# EAGLE board Mainboard_RIGHT (EAGLE 9.6.2), part 1 of 3
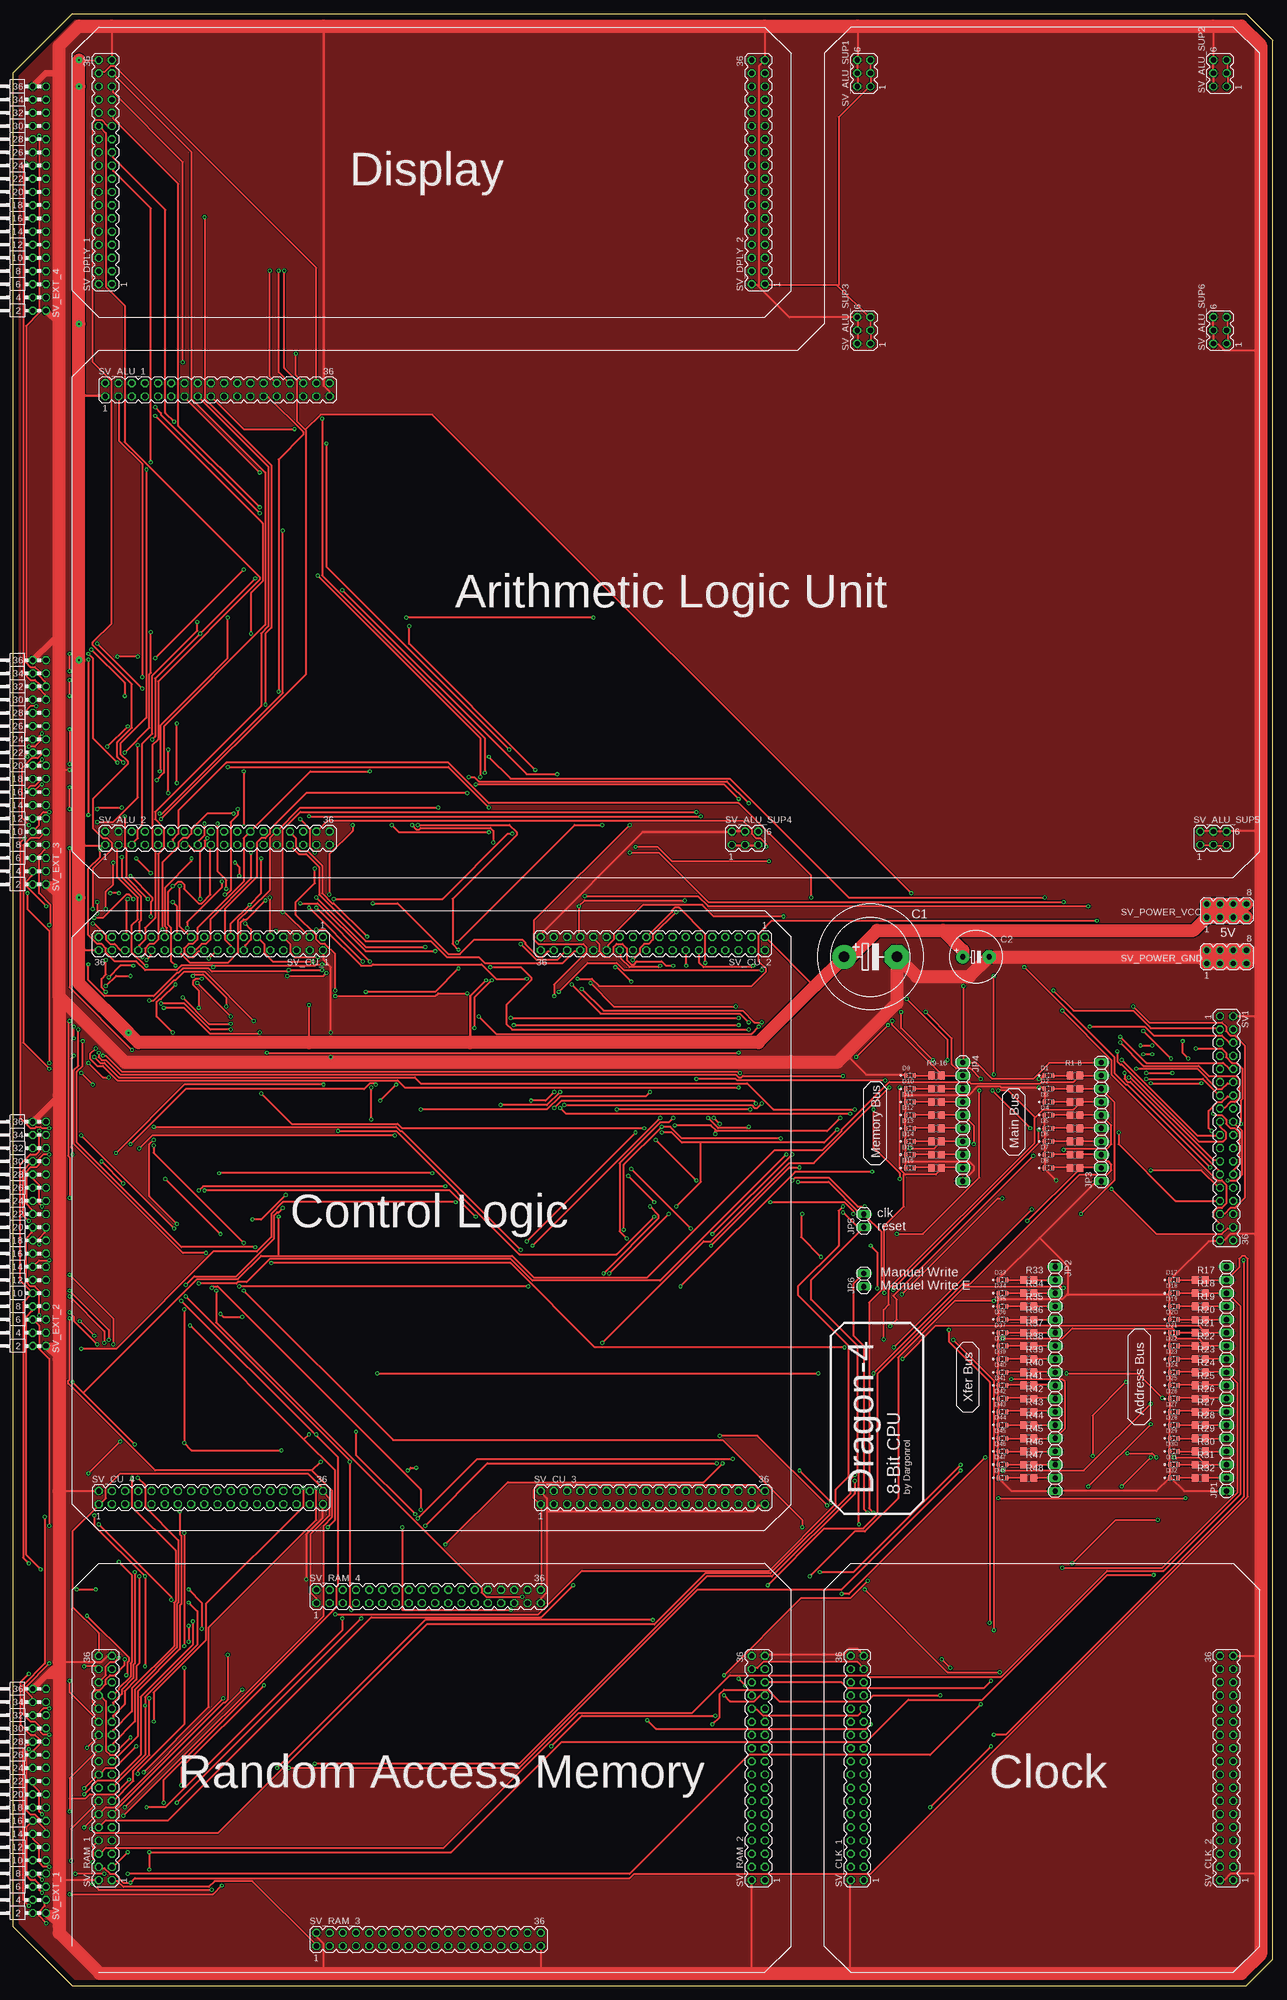
[diagram p0: board, top side]
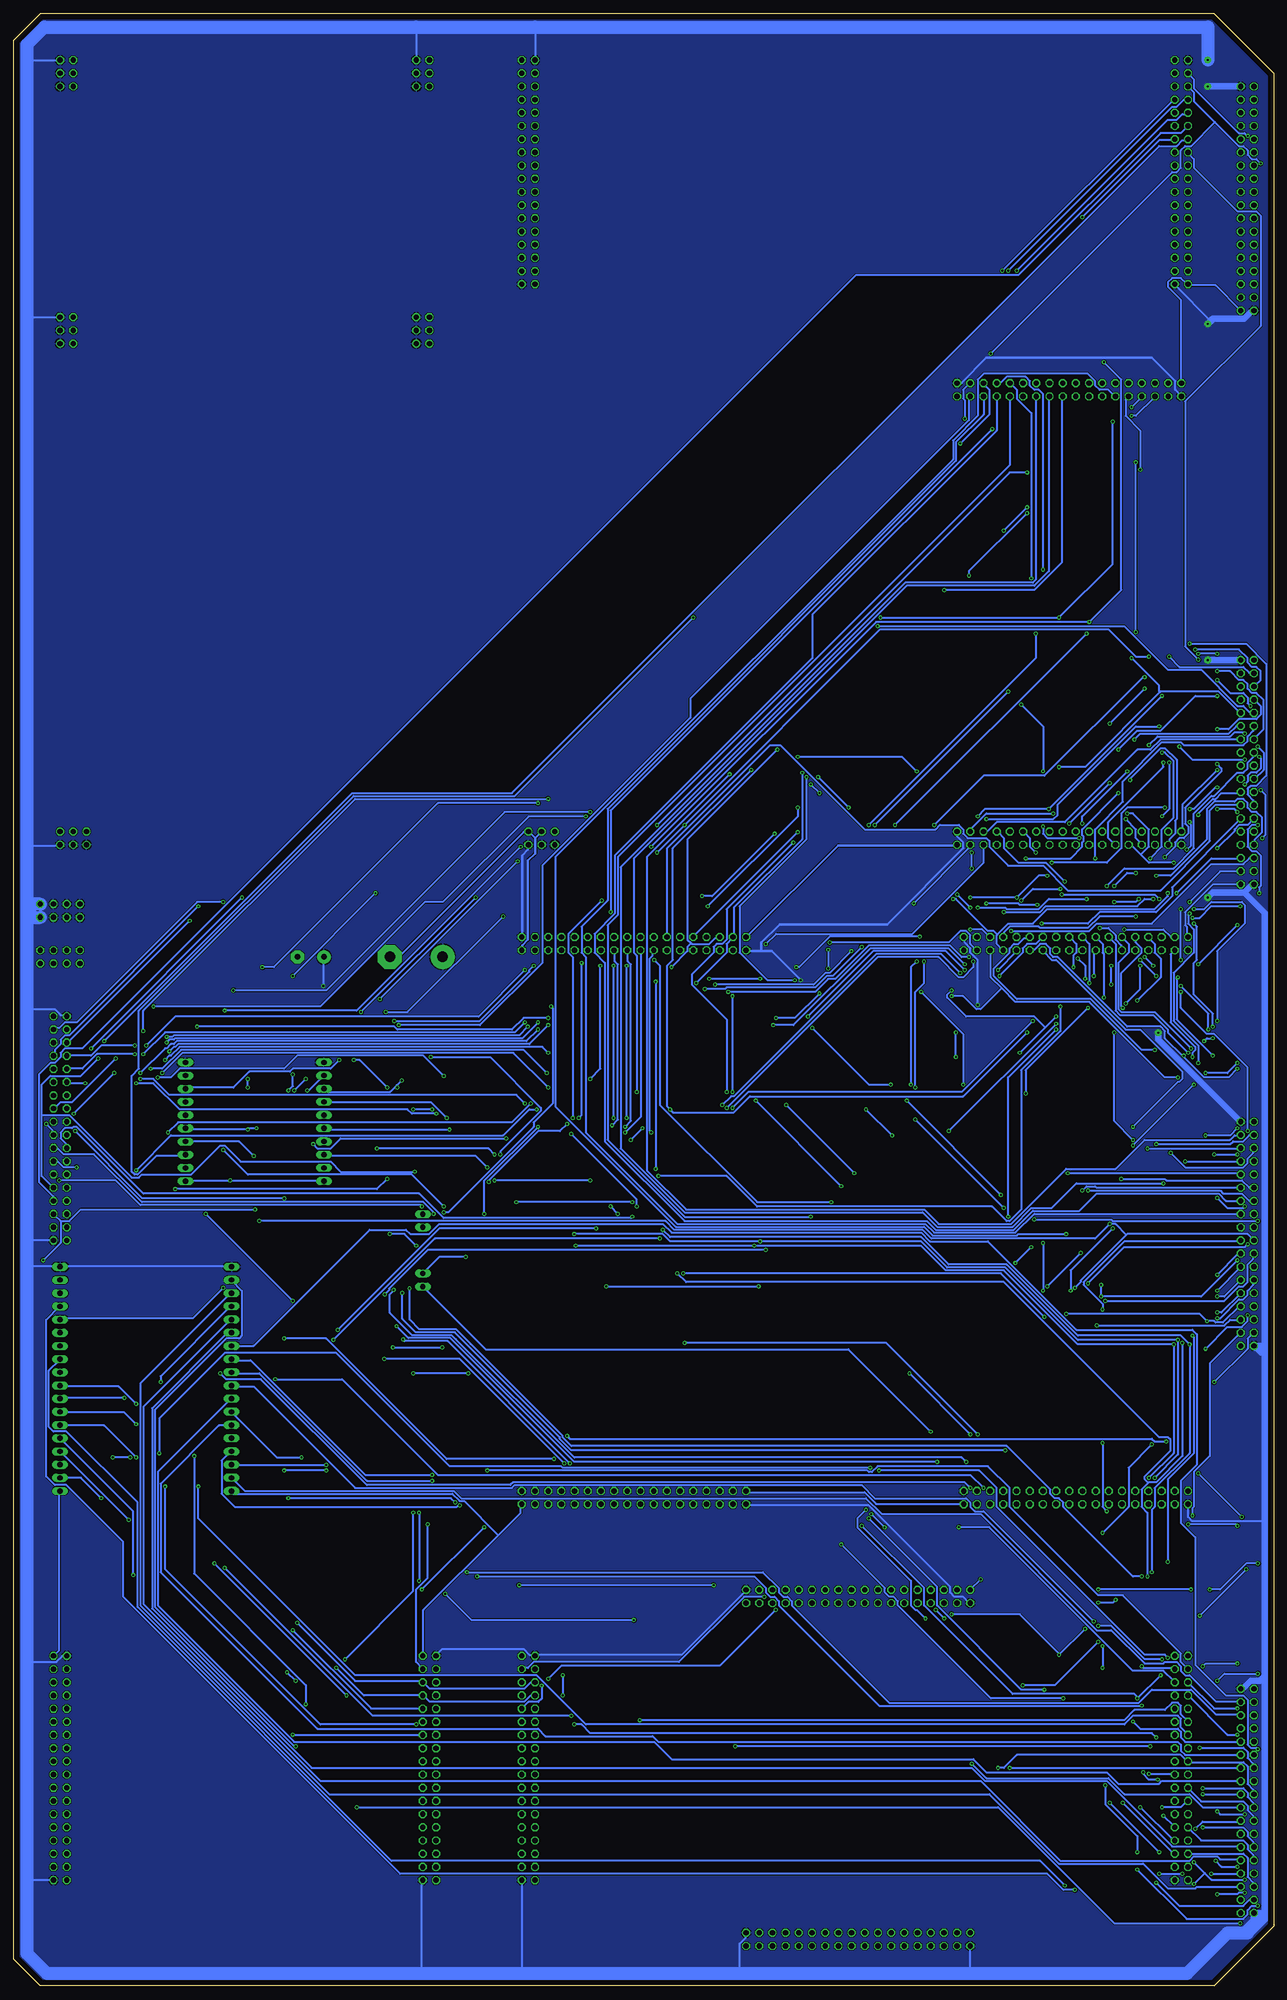
[diagram p1: board, bottom side, seen from below]

Size 242.57 x 379.73 mm. Coordinates in mm from the lower left corner, seen from the top.
Outline: 11.43,379.73 0,368.3 0,11.43 11.43,0 237.49,0 242.57,5.08 242.57,374.65 237.49,379.73 11.43,379.73
Copper layers (1*16): Top 0.035mm / dielectric 1.5mm / Bottom 0.035mm
Design rules "default *": minimum track width 16mil, minimum drill 0.35mm, track to track 6mil, track to pad 6mil, pad to pad 6mil, via to via 6mil, smd to smd 6mil, copper to edge 40mil, drill to drill 6mil, minimum pad ring 10mil, minimum via ring 8mil, stop-mask expansion 4mil, vias tented up to drill 0mil, thermal gap 10mil

## Footprints (pad centres in the part's own frame; a part is rotated, then mirrored left to right if it is on the bottom)
EB20D = drill 2.007 pad 4.597: + -5.08,0 | drill 2.007 pad 4.597 octagon: - 5.08,0
E5-10,5 = drill 1.016 pad 2.54: + -2.54,0 | drill 1.016 pad 2.54 octagon: - 2.54,0
LEDC1608X45N = smd 0.81 x 0.93: A 0.81,0; C -0.81,0
1X18 = drill 1.016 long: 1 -21.59,0; 2 -19.05,0; 3 -16.51,0; 4 -13.97,0; 5 -11.43,0; 6 -8.89,0; 7 -6.35,0; 8 -3.81,0; 9 -1.27,0; 10 1.27,0; 11 3.81,0; 12 6.35,0; 13 8.89,0; 14 11.43,0; 15 13.97,0; 16 16.51,0; 17 19.05,0; 18 21.59,0
1X10 = drill 1.016 long: 1 -11.43,0; 2 -8.89,0; 3 -6.35,0; 4 -3.81,0; 5 -1.27,0; 6 1.27,0; 7 3.81,0; 8 6.35,0; 9 8.89,0; 10 11.43,0
1X02 = drill 1.016 long: 1 -1.27,0; 2 1.27,0
R0805 = smd 1.3 x 1.5: 1 -0.95,0; 2 0.95,0
MA18-2 = drill 1.016 octagon: 1 -21.59,-1.27; 2 -21.59,1.27; 3 -19.05,-1.27; 4 -19.05,1.27; 5 -16.51,-1.27; 6 -16.51,1.27; 7 -13.97,-1.27; 8 -13.97,1.27; 9 -11.43,-1.27; 10 -11.43,1.27; 11 -8.89,-1.27; 12 -8.89,1.27; 13 -6.35,-1.27; 14 -6.35,1.27; 15 -3.81,-1.27; 16 -3.81,1.27; 17 -1.27,-1.27; 18 -1.27,1.27; 19 1.27,-1.27; 20 1.27,1.27; 21 3.81,-1.27; 22 3.81,1.27; 23 6.35,-1.27; 24 6.35,1.27; 25 8.89,-1.27; 26 8.89,1.27; 27 11.43,-1.27; 28 11.43,1.27; 29 13.97,-1.27; 30 13.97,1.27; 31 16.51,-1.27; 32 16.51,1.27; 33 19.05,-1.27; 34 19.05,1.27; 35 21.59,-1.27; 36 21.59,1.27
MA03-2 = drill 1.016: 1 -2.54,-1.27 | drill 1.016 octagon: 2 -2.54,1.27; 3 0,-1.27; 4 0,1.27; 5 2.54,-1.27; 6 2.54,1.27
MA18-2W = drill 1.016 octagon: 1 -21.59,-1.27; 2 -21.59,1.27; 3 -19.05,-1.27; 4 -19.05,1.27; 5 -16.51,-1.27; 6 -16.51,1.27; 7 -13.97,-1.27; 8 -13.97,1.27; 9 -11.43,-1.27; 10 -11.43,1.27; 11 -8.89,-1.27; 12 -8.89,1.27; 13 -6.35,-1.27; 14 -6.35,1.27; 15 -3.81,-1.27; 16 -3.81,1.27; 17 -1.27,-1.27; 18 -1.27,1.27; 19 1.27,-1.27; 20 1.27,1.27; 21 3.81,-1.27; 22 3.81,1.27; 23 6.35,-1.27; 24 6.35,1.27; 25 8.89,-1.27; 26 8.89,1.27; 27 11.43,-1.27; 28 11.43,1.27; 29 13.97,-1.27; 30 13.97,1.27; 31 16.51,-1.27; 32 16.51,1.27; 33 19.05,-1.27; 34 19.05,1.27; 35 21.59,-1.27; 36 21.59,1.27
MA04-2 = drill 1.016 octagon: 1 -3.81,-1.27; 2 -3.81,1.27; 3 -1.27,-1.27; 4 -1.27,1.27; 5 1.27,-1.27; 6 1.27,1.27; 7 3.81,-1.27; 8 3.81,1.27

## Placement (x,y rotation side)
C1  [EB20D]  165.1,198.12 0 top
C2  [E5-10,5]  185.42,198.12 0 top
D1  LTST-C193KRKT-5A  [LEDC1608X45N]  199.39,175.26 0 top
D2  LTST-C193KRKT-5A  [LEDC1608X45N]  199.39,172.72 0 top
D3  LTST-C193KRKT-5A  [LEDC1608X45N]  199.39,170.18 0 top
D4  LTST-C193KRKT-5A  [LEDC1608X45N]  199.39,167.64 0 top
D5  LTST-C193KRKT-5A  [LEDC1608X45N]  199.39,165.1 0 top
D6  LTST-C193KRKT-5A  [LEDC1608X45N]  199.39,162.56 0 top
D7  LTST-C193KRKT-5A  [LEDC1608X45N]  199.39,160.02 0 top
D8  LTST-C193KRKT-5A  [LEDC1608X45N]  199.39,157.48 0 top
D9  LTST-C193KRKT-5A  [LEDC1608X45N]  172.72,175.26 0 top
D10  LTST-C193KRKT-5A  [LEDC1608X45N]  172.72,172.72 0 top
D11  LTST-C193KRKT-5A  [LEDC1608X45N]  172.72,170.18 0 top
D12  LTST-C193KRKT-5A  [LEDC1608X45N]  172.72,167.64 0 top
D13  LTST-C193KRKT-5A  [LEDC1608X45N]  172.72,165.1 0 top
D14  LTST-C193KRKT-5A  [LEDC1608X45N]  172.72,162.56 0 top
D15  LTST-C193KRKT-5A  [LEDC1608X45N]  172.72,160.02 0 top
D16  LTST-C193KRKT-5A  [LEDC1608X45N]  172.72,157.48 0 top
D17  LTST-C193KRKT-5A  [LEDC1608X45N]  223.52,135.89 0 top
D18  LTST-C193KRKT-5A  [LEDC1608X45N]  223.52,133.35 0 top
D19  LTST-C193KRKT-5A  [LEDC1608X45N]  223.52,130.81 0 top
D20  LTST-C193KRKT-5A  [LEDC1608X45N]  223.52,128.27 0 top
D21  LTST-C193KRKT-5A  [LEDC1608X45N]  223.52,125.73 0 top
D22  LTST-C193KRKT-5A  [LEDC1608X45N]  223.52,123.19 0 top
D23  LTST-C193KRKT-5A  [LEDC1608X45N]  223.52,120.65 0 top
D24  LTST-C193KRKT-5A  [LEDC1608X45N]  223.52,118.11 0 top
D25  LTST-C193KRKT-5A  [LEDC1608X45N]  223.52,115.57 0 top
D26  LTST-C193KRKT-5A  [LEDC1608X45N]  223.52,113.03 0 top
D27  LTST-C193KRKT-5A  [LEDC1608X45N]  223.52,110.49 0 top
D28  LTST-C193KRKT-5A  [LEDC1608X45N]  223.52,107.95 0 top
D29  LTST-C193KRKT-5A  [LEDC1608X45N]  223.52,105.41 0 top
D30  LTST-C193KRKT-5A  [LEDC1608X45N]  223.52,102.87 0 top
D31  LTST-C193KRKT-5A  [LEDC1608X45N]  223.52,100.33 0 top
D32  LTST-C193KRKT-5A  [LEDC1608X45N]  223.52,97.79 0 top
D33  LTST-C193KRKT-5A  [LEDC1608X45N]  190.5,135.89 0 top
D34  LTST-C193KRKT-5A  [LEDC1608X45N]  190.5,133.35 0 top
D35  LTST-C193KRKT-5A  [LEDC1608X45N]  190.5,130.81 0 top
D36  LTST-C193KRKT-5A  [LEDC1608X45N]  190.5,128.27 0 top
D37  LTST-C193KRKT-5A  [LEDC1608X45N]  190.5,125.73 0 top
D38  LTST-C193KRKT-5A  [LEDC1608X45N]  190.5,123.19 0 top
D39  LTST-C193KRKT-5A  [LEDC1608X45N]  190.5,120.65 0 top
D40  LTST-C193KRKT-5A  [LEDC1608X45N]  190.5,118.11 0 top
D41  LTST-C193KRKT-5A  [LEDC1608X45N]  190.5,115.57 0 top
D42  LTST-C193KRKT-5A  [LEDC1608X45N]  190.5,113.03 0 top
D43  LTST-C193KRKT-5A  [LEDC1608X45N]  190.5,110.49 0 top
D44  LTST-C193KRKT-5A  [LEDC1608X45N]  190.5,107.95 0 top
D45  LTST-C193KRKT-5A  [LEDC1608X45N]  190.5,105.41 0 top
D46  LTST-C193KRKT-5A  [LEDC1608X45N]  190.5,102.87 0 top
D47  LTST-C193KRKT-5A  [LEDC1608X45N]  190.5,100.33 0 top
D48  LTST-C193KRKT-5A  [LEDC1608X45N]  190.5,97.79 0 top
JP1  [1X18]  233.68,116.84 90 top
JP2  [1X18]  200.66,116.84 270 top
JP3  [1X10]  209.55,166.37 90 top
JP4  [1X10]  182.88,166.37 270 top
JP5  [1X02]  163.83,147.32 90 top
JP6  [1X02]  163.83,135.89 90 top
R1  [R0805]  204.47,175.26 0 top
R2  [R0805]  204.47,172.72 0 top
R3  [R0805]  204.47,170.18 0 top
R4  [R0805]  204.47,167.64 0 top
R5  [R0805]  204.47,165.1 0 top
R6  [R0805]  204.47,162.56 0 top
R7  [R0805]  204.47,160.02 0 top
R8  [R0805]  204.47,157.48 0 top
R9  [R0805]  177.8,175.26 0 top
R10  [R0805]  177.8,172.72 0 top
R11  [R0805]  177.8,170.18 0 top
R12  [R0805]  177.8,167.64 0 top
R13  [R0805]  177.8,165.1 0 top
R14  [R0805]  177.8,162.56 0 top
R15  [R0805]  177.8,160.02 0 top
R16  [R0805]  177.8,157.48 0 top
R17  [R0805]  228.6,135.89 0 top
R18  [R0805]  228.6,133.35 0 top
R19  [R0805]  228.6,130.81 0 top
R20  [R0805]  228.6,128.27 0 top
R21  [R0805]  228.6,125.73 0 top
R22  [R0805]  228.6,123.19 0 top
R23  [R0805]  228.6,120.65 0 top
R24  [R0805]  228.6,118.11 0 top
R25  [R0805]  228.6,115.57 0 top
R26  [R0805]  228.6,113.03 0 top
R27  [R0805]  228.6,110.49 0 top
R28  [R0805]  228.6,107.95 0 top
R29  [R0805]  228.6,105.41 0 top
R30  [R0805]  228.6,102.87 0 top
R31  [R0805]  228.6,100.33 0 top
R32  [R0805]  228.6,97.79 0 top
R33  [R0805]  195.58,135.89 0 top
R34  [R0805]  195.58,133.35 0 top
R35  [R0805]  195.58,130.81 0 top
R36  [R0805]  195.58,128.27 0 top
R37  [R0805]  195.58,125.73 0 top
R38  [R0805]  195.58,123.19 0 top
R39  [R0805]  195.58,120.65 0 top
R40  [R0805]  195.58,118.11 0 top
R41  [R0805]  195.58,115.57 0 top
R42  [R0805]  195.58,113.03 0 top
R43  [R0805]  195.58,110.49 0 top
R44  [R0805]  195.58,107.95 0 top
R45  [R0805]  195.58,105.41 0 top
R46  [R0805]  195.58,102.87 0 top
R47  [R0805]  195.58,100.33 0 top
R48  [R0805]  195.58,97.79 0 top
SV1  [MA18-2]  233.68,165.1 270 top
SV_ALU_1  [MA18-2]  39.37,307.34 0 top
SV_ALU_2  [MA18-2]  39.37,220.98 0 top
SV_ALU_SUP1  [MA03-2]  163.83,368.3 90 top
SV_ALU_SUP2  [MA03-2]  232.41,368.3 90 top
SV_ALU_SUP3  [MA03-2]  163.83,318.77 90 top
SV_ALU_SUP4  [MA03-2]  140.97,220.98 0 top
SV_ALU_SUP5  [MA03-2]  231.14,220.98 0 top
SV_ALU_SUP6  [MA03-2]  232.41,318.77 90 top
SV_CLK_1  [MA18-2]  162.56,41.91 90 top
SV_CLK_2  [MA18-2]  233.68,41.91 90 top
SV_CU_1  [MA18-2]  38.1,200.66 180 top
SV_CU_2  [MA18-2]  123.19,200.66 180 top
SV_CU_3  [MA18-2]  123.19,93.98 0 top
SV_CU_4  [MA18-2]  38.1,93.98 0 top
SV_DPLY_1  [MA18-2]  17.78,349.25 90 top
SV_DPLY_2  [MA18-2]  143.51,349.25 90 top
SV_EXT_1  [MA18-2W]  5.08,35.56 90 top
SV_EXT_2  [MA18-2W]  5.08,144.78 90 top
SV_EXT_3  [MA18-2W]  5.08,233.68 90 top
SV_EXT_4  [MA18-2W]  5.08,344.17 90 top
SV_POWER_GND  [MA04-2]  233.68,198.12 0 top
SV_POWER_VCC  [MA04-2]  233.68,207.01 0 top
SV_RAM_1  [MA18-2]  17.78,41.91 90 top
SV_RAM_2  [MA18-2]  143.51,41.91 90 top
SV_RAM_3  [MA18-2]  80.01,8.89 0 top
SV_RAM_4  [MA18-2]  80.01,74.93 0 top

## Library data of the parts
C1 C2 = rcl; SPICEPREFIX: C
D1-D48 = Dargon's_lib; MANUFACTURER: Lite-On; MAXIMUM_PACKAGE_HEIGHT: 0.45 mm; PARTREV: C; STANDARD: IPC 7351B
JP1-JP6 = pinhead
R1-R48 = rcl; SPICEPREFIX: R
SV1 SV_ALU_1 SV_ALU_2 SV_ALU_SUP1-SV_ALU_SUP6 SV_CLK_1 SV_CLK_2 SV_CU_1-SV_CU_4 SV_DPLY_1 SV_DPLY_2 SV_EXT_1-SV_EXT_4 SV_POWER_GND SV_POWER_VCC SV_RAM_1-SV_RAM_4 = con-lstb; OC_FARNELL: unknown; OC_NEWARK: unknown

## Nets
!CLK: SV_ALU_1.32 SV_CLK_1.31 SV_CU_2.31 SV_DPLY_1.32 SV_EXT_3.29 SV_RAM_2.32
!CTRL_ALU_ASSERT: SV_ALU_2.32 SV_EXT_3.23
!CTRL_DPLY_ENABLE: SV_DPLY_1.22 SV_EXT_3.15
!CTRL_IR_LOAD: SV_CU_2.23 SV_EXT_3.13
!CTRL_RAM_ASSERT_MAIN: SV_EXT_3.21 SV_RAM_2.31
!CTRL_RAM_LOAD_MAIN: SV_EXT_3.17 SV_RAM_2.33
!RESET: SV_ALU_1.28 SV_CLK_1.27 SV_CU_2.27 SV_DPLY_1.28 SV_EXT_3.25 SV_RAM_2.28
ADDRESS_BUS_0: JP1.2 R32.2 SV_EXT_1.34 SV_RAM_1.34
ADDRESS_BUS_1: JP1.3 R31.2 SV_EXT_1.32 SV_RAM_1.32
ADDRESS_BUS_2: JP1.4 R30.2 SV_EXT_1.30 SV_RAM_1.30
ADDRESS_BUS_3: JP1.5 R29.2 SV_EXT_1.28 SV_RAM_1.28
ADDRESS_BUS_4: JP1.6 R28.2 SV_EXT_1.26 SV_RAM_1.26
ADDRESS_BUS_5: JP1.7 R27.2 SV_EXT_1.24 SV_RAM_1.24
ADDRESS_BUS_6: JP1.8 R26.2 SV_EXT_1.22 SV_RAM_1.22
ADDRESS_BUS_7: JP1.9 R25.2 SV_EXT_1.20 SV_RAM_1.20
ADDRESS_BUS_8: JP1.10 R24.2 SV_EXT_1.18 SV_RAM_1.18
ADDRESS_BUS_9: JP1.11 R23.2 SV_EXT_1.16 SV_RAM_1.16
ADDRESS_BUS_10: JP1.12 R22.2 SV_EXT_1.14 SV_RAM_1.14
ADDRESS_BUS_11: JP1.13 R21.2 SV_EXT_1.12 SV_RAM_1.12
ADDRESS_BUS_12: JP1.14 R20.2 SV_EXT_1.10 SV_RAM_1.10
ADDRESS_BUS_13: JP1.15 R19.2 SV_EXT_1.8 SV_RAM_1.8
ADDRESS_BUS_14: JP1.16 R18.2 SV_EXT_1.6 SV_RAM_1.6
ADDRESS_BUS_15: JP1.17 R17.2 SV_EXT_1.4 SV_RAM_1.4
ALU_LEFT_BUS_0: SV_ALU_1.3 SV_EXT_2.34
ALU_LEFT_BUS_1: SV_ALU_1.5 SV_EXT_2.32
ALU_LEFT_BUS_2: SV_ALU_1.7 SV_EXT_2.30
ALU_LEFT_BUS_3: SV_ALU_1.9 SV_EXT_2.28
ALU_LEFT_BUS_4: SV_ALU_1.11 SV_EXT_2.26
ALU_LEFT_BUS_5: SV_ALU_1.13 SV_EXT_2.24
ALU_LEFT_BUS_6: SV_ALU_1.15 SV_EXT_2.22
ALU_LEFT_BUS_7: SV_ALU_1.17 SV_EXT_2.20
ALU_RIGHT_BUS_0: SV_ALU_1.19 SV_EXT_2.33
ALU_RIGHT_BUS_1: SV_ALU_1.21 SV_EXT_2.31
ALU_RIGHT_BUS_2: SV_ALU_1.23 SV_EXT_2.29
ALU_RIGHT_BUS_3: SV_ALU_1.25 SV_EXT_2.27
ALU_RIGHT_BUS_4: SV_ALU_1.27 SV_EXT_2.25
ALU_RIGHT_BUS_5: SV_ALU_1.29 SV_EXT_2.23
ALU_RIGHT_BUS_6: SV_ALU_1.31 SV_EXT_2.21
ALU_RIGHT_BUS_7: SV_ALU_1.33 SV_EXT_2.19
CLK: JP5.1 SV_ALU_1.34 SV_CLK_1.33 SV_CU_2.33 SV_DPLY_1.34 SV_EXT_3.31 SV_RAM_2.34
CTRL1_REG_A_1: SV1.3 SV_CU_1.3 SV_EXT_3.4
CTRL2_REG_A_2: SV1.5 SV_CU_1.5 SV_EXT_3.6
CTRL3_REG_A_3: SV1.7 SV_CU_1.7 SV_EXT_3.8
CTRL4_REG_A_4: SV1.9 SV_CU_1.9 SV_EXT_3.10
CTRL5_REG_L_1: SV1.11 SV_CU_1.11 SV_EXT_3.12
CTRL6_REG_L_2: SV1.13 SV_CU_1.13 SV_EXT_3.14
CTRL7_REG_L_3: SV1.15 SV_CU_1.15 SV_EXT_3.16
CTRL8_REG_L_4: SV1.17 SV_CU_1.17 SV_EXT_3.18
CTRL9_16REG_A_ADDR_1: SV1.19 SV_CU_1.19 SV_EXT_3.20
CTRL10_16REG_A_ADDR_2: SV1.21 SV_CU_1.21 SV_EXT_3.22
CTRL11_16REG_A_ADDR_3: SV1.23 SV_CU_1.23 SV_EXT_3.24
CTRL12_CREG_INC_1: SV1.25 SV_CU_1.25 SV_EXT_3.26
CTRL13_CREG_INC_2: SV1.27 SV_CU_1.27 SV_EXT_3.28
CTRL14_CREG_DEC_1: SV1.29 SV_CU_1.29 SV_EXT_3.30
CTRL15_CREG_DEC_2: SV1.31 SV_CU_1.31 SV_EXT_3.32
CTRL16_FLAGS: SV1.33 SV_ALU_2.34 SV_CU_1.33
CTRL17_GPR_A_ALU_R_1: SV1.4 SV_CU_1.4 SV_EXT_3.34
CTRL18_GPR_A_ALU_R_2: SV1.6 SV_CU_1.6 SV_EXT_3.3
CTRL19_GPR_A_ALU_R_3: SV1.8 SV_CU_1.8 SV_EXT_3.5
CTRL20_GPR_A_ALU_L_1: SV1.10 SV_CU_1.10 SV_EXT_3.7
CTRL21_GPR_A_ALU_L_2: SV1.12 SV_CU_1.12 SV_EXT_3.9
CTRL22_GPR_A_ALU_L_3: SV1.14 SV_CU_1.14 SV_EXT_3.11
CTRL23_NONE_1: SV1.16 SV_CU_1.16
CTRL24_NONE_2: SV1.18 SV_CU_1.18
CTRL25_ALU_OP_1: SV1.20 SV_ALU_2.24 SV_CU_1.20
CTRL26_ALU_OP_2: SV1.22 SV_ALU_2.26 SV_CU_1.22
CTRL27_ALU_OP_3: SV1.24 SV_ALU_2.28 SV_CU_1.24
CTRL28_ALU_OP_4: SV1.26 SV_ALU_2.30 SV_CU_1.26
CTRL29_DPLY_RS: SV1.28 SV_CU_1.28 SV_DPLY_1.24
CTRL30_DPLY_RW: SV1.30 SV_CU_1.30 SV_DPLY_1.26
CTRL31_HLT: SV1.32 SV_CLK_1.23 SV_CU_1.32
CTRL32_RST_STEP: SV1.34 SV_CU_1.34
CTRL_MANUAL_WRITE: JP6.2 SV_CU_2.19 SV_RAM_2.29
CTRL_MANUAL_WRITE_ENABLE: JP6.1 SV_RAM_2.27
FLAGS_1: SV_ALU_2.33 SV_CU_2.34
FLAGS_2: SV_ALU_2.31 SV_CU_2.32
FLAGS_3: SV_ALU_2.29 SV_CU_2.30
FLAGS_4: SV_CU_2.28
GND: C1.- C2.- D1.C D2.C D3.C D4.C D5.C D6.C D7.C D8.C D9.C D10.C D11.C D12.C D13.C D14.C D15.C D16.C D17.C D18.C D19.C D20.C D21.C D22.C D23.C D24.C D25.C D26.C D27.C D28.C D29.C D30.C D31.C D32.C D33.C D34.C D35.C D36.C D37.C D38.C D39.C D40.C D41.C D42.C D43.C D44.C D45.C D46.C D47.C D48.C JP1.1 JP2.18 JP3.1 JP4.10 SV1.2 SV1.35 SV_ALU_1.2 SV_ALU_1.35 SV_ALU_2.2 SV_ALU_2.35 SV_ALU_SUP1.2 SV_ALU_SUP1.4 SV_ALU_SUP1.6 SV_ALU_SUP2.2 SV_ALU_SUP2.4 SV_ALU_SUP2.6 SV_ALU_SUP3.2 SV_ALU_SUP3.4 SV_ALU_SUP3.6 SV_ALU_SUP4.2 SV_ALU_SUP4.4 SV_ALU_SUP4.6 SV_ALU_SUP5.2 SV_ALU_SUP5.4 SV_ALU_SUP5.6 SV_ALU_SUP6.2 SV_ALU_SUP6.4 SV_ALU_SUP6.6 SV_CLK_1.2 SV_CLK_1.35 SV_CLK_2.2 SV_CLK_2.35 SV_CU_1.2 SV_CU_1.35 SV_CU_2.2 SV_CU_2.35 SV_CU_3.2 SV_CU_3.35 SV_CU_4.2 SV_CU_4.35 SV_DPLY_1.2 SV_DPLY_1.35 SV_DPLY_2.2 SV_DPLY_2.35 SV_EXT_1.1 SV_EXT_1.36 SV_EXT_2.1 SV_EXT_2.36 SV_EXT_3.1 SV_EXT_3.36 SV_EXT_4.1 SV_EXT_4.36 SV_POWER_GND.1 SV_POWER_GND.2 SV_POWER_GND.3 SV_POWER_GND.4 SV_POWER_GND.5 SV_POWER_GND.6 SV_POWER_GND.7 SV_POWER_GND.8 SV_RAM_1.2 SV_RAM_1.35 SV_RAM_2.2 SV_RAM_2.35 SV_RAM_3.2 SV_RAM_3.35 SV_RAM_4.2 SV_RAM_4.35
MAIN_BUS_0: JP3.2 R8.2 SV_ALU_2.17 SV_DPLY_1.19 SV_EXT_2.18 SV_RAM_1.3
MAIN_BUS_1: JP3.3 R7.2 SV_ALU_2.15 SV_DPLY_1.21 SV_EXT_2.16 SV_RAM_1.5
MAIN_BUS_2: JP3.4 R6.2 SV_ALU_2.13 SV_DPLY_1.23 SV_EXT_2.14 SV_RAM_1.7
MAIN_BUS_3: JP3.5 R5.2 SV_ALU_2.11 SV_DPLY_1.25 SV_EXT_2.12 SV_RAM_1.9
MAIN_BUS_4: JP3.6 R4.2 SV_ALU_2.9 SV_DPLY_1.27 SV_EXT_2.10 SV_RAM_1.11
MAIN_BUS_5: JP3.7 R3.2 SV_ALU_2.7 SV_DPLY_1.29 SV_EXT_2.8 SV_RAM_1.13
MAIN_BUS_6: JP3.8 R2.2 SV_ALU_2.5 SV_DPLY_1.31 SV_EXT_2.6 SV_RAM_1.15
MAIN_BUS_7: JP3.9 R1.2 SV_ALU_2.3 SV_DPLY_1.33 SV_EXT_2.4 SV_RAM_1.17
MEMORY_BUS_0: JP4.9 R16.2 SV_CU_2.26 SV_EXT_2.17 SV_RAM_1.19
MEMORY_BUS_1: JP4.8 R15.2 SV_CU_2.24 SV_EXT_2.15 SV_RAM_1.21
MEMORY_BUS_2: JP4.7 R14.2 SV_CU_2.22 SV_EXT_2.13 SV_RAM_1.23
MEMORY_BUS_3: JP4.6 R13.2 SV_CU_2.20 SV_EXT_2.11 SV_RAM_1.25
MEMORY_BUS_4: JP4.5 R12.2 SV_CU_2.18 SV_EXT_2.9 SV_RAM_1.27
MEMORY_BUS_5: JP4.4 R11.2 SV_CU_2.16 SV_EXT_2.7 SV_RAM_1.29
MEMORY_BUS_6: JP4.3 R10.2 SV_CU_2.14 SV_EXT_2.5 SV_RAM_1.31
MEMORY_BUS_7: JP4.2 R9.2 SV_CU_2.12 SV_EXT_2.3 SV_RAM_1.33
N$2: D1.A R1.1
N$3: D2.A R2.1
N$4: D3.A R3.1
N$5: D4.A R4.1
N$6: D5.A R5.1
N$7: D6.A R6.1
N$8: D7.A R7.1
N$9: D8.A R8.1
N$10: D9.A R9.1
N$11: D10.A R10.1
N$12: D11.A R11.1
N$13: D12.A R12.1
N$14: D13.A R13.1
N$15: D14.A R14.1
N$16: D15.A R15.1
N$17: D16.A R16.1
N$18: D17.A R17.1
N$19: D18.A R18.1
N$20: D19.A R19.1
N$21: D20.A R20.1
N$22: D21.A R21.1
N$23: D22.A R22.1
N$24: D23.A R23.1
N$25: SV_EXT_3.19
N$26: D24.A R24.1
N$27: D25.A R25.1
N$28: D26.A R26.1
N$29: D27.A R27.1
N$30: D28.A R28.1
N$31: D29.A R29.1
N$32: D30.A R30.1
N$33: D31.A R31.1
N$34: D32.A R32.1
N$35: D33.A R33.1
N$36: D34.A R34.1
N$37: D35.A R35.1
N$38: D36.A R36.1
N$39: D37.A R37.1
N$40: D38.A R38.1
N$41: D39.A R39.1
N$42: D40.A R40.1
N$43: D41.A R41.1
N$44: D42.A R42.1
N$45: D43.A R43.1
N$46: D44.A R44.1
N$47: D45.A R45.1
N$48: D46.A R46.1
N$49: D47.A R47.1
N$50: D48.A R48.1
RESET: JP5.2 SV_ALU_1.30 SV_CLK_1.29 SV_CU_2.29 SV_DPLY_1.30 SV_EXT_3.27 SV_RAM_2.30
VCC: C1.+ C2.+ JP1.18 JP2.1 JP3.10 JP4.1 SV1.1 SV1.36 SV_ALU_1.1 SV_ALU_1.36 SV_ALU_2.1 SV_ALU_2.36 SV_ALU_SUP1.1 SV_ALU_SUP1.3 SV_ALU_SUP1.5 SV_ALU_SUP2.1 SV_ALU_SUP2.3 SV_ALU_SUP2.5 SV_ALU_SUP3.1 SV_ALU_SUP3.3 SV_ALU_SUP3.5 SV_ALU_SUP4.1 SV_ALU_SUP4.3 SV_ALU_SUP4.5 SV_ALU_SUP5.1 SV_ALU_SUP5.3 SV_ALU_SUP5.5 SV_ALU_SUP6.1 SV_ALU_SUP6.3 SV_ALU_SUP6.5 SV_CLK_1.1 SV_CLK_1.36 SV_CLK_2.1 SV_CLK_2.36 SV_CU_1.1 SV_CU_1.36 SV_CU_2.1 SV_CU_2.36 SV_CU_3.1 SV_CU_3.36 SV_CU_4.1 SV_CU_4.36 SV_DPLY_1.1 SV_DPLY_1.36 SV_DPLY_2.1 SV_DPLY_2.36 SV_EXT_1.2 SV_EXT_1.35 SV_EXT_2.2 SV_EXT_2.35 SV_EXT_3.2 SV_EXT_3.35 SV_EXT_4.2 SV_EXT_4.35 SV_POWER_VCC.1 SV_POWER_VCC.2 SV_POWER_VCC.3 SV_POWER_VCC.4 SV_POWER_VCC.5 SV_POWER_VCC.6 SV_POWER_VCC.7 SV_POWER_VCC.8 SV_RAM_1.1 SV_RAM_1.36 SV_RAM_2.1 SV_RAM_2.36 SV_RAM_3.1 SV_RAM_3.36 SV_RAM_4.1 SV_RAM_4.36
XFER_BUS_0: JP2.17 R48.2 SV_EXT_1.33
XFER_BUS_1: JP2.16 R47.2 SV_EXT_1.31
XFER_BUS_2: JP2.15 R46.2 SV_EXT_1.29
XFER_BUS_3: JP2.14 R45.2 SV_EXT_1.27
XFER_BUS_4: JP2.13 R44.2 SV_EXT_1.25
XFER_BUS_5: JP2.12 R43.2 SV_EXT_1.23
XFER_BUS_6: JP2.11 R42.2 SV_EXT_1.21
XFER_BUS_7: JP2.10 R41.2 SV_EXT_1.19
XFER_BUS_8: JP2.9 R40.2 SV_EXT_1.17
XFER_BUS_9: JP2.8 R39.2 SV_EXT_1.15
XFER_BUS_10: JP2.7 R38.2 SV_EXT_1.13
XFER_BUS_11: JP2.6 R37.2 SV_EXT_1.11
XFER_BUS_12: JP2.5 R36.2 SV_EXT_1.9
XFER_BUS_13: JP2.4 R35.2 SV_EXT_1.7
XFER_BUS_14: JP2.3 R34.2 SV_EXT_1.5
XFER_BUS_15: JP2.2 R33.2 SV_EXT_1.3

## Tracks (layer width: path | path; a pad name or v marks a point on that pad's centre or on a via)
!CLK  (via drill 0.35)
  Top 0.406: v2.52,350.93 1.96,350.37 1.96,252.86 3.35,251.46 4.19,251.46 5.03,250.62 5.03,249.78 6.15,248.67 6.15,247.83 SV_EXT_3.29 | v95.56,238.05 60.35,273.25 v60.35,297 | v188.04,69.85 188.04,116.23 180.21,124.05 v180.21,126.29 | v119.02,157.3 v130.48,145.85 | v119.02,193.34 116.23,196.14 v115.95,196.14 | v54.48,314.32 54.48,310.13 55.88,308.74 SV_ALU_1.32
  Bottom 0.406: v2.52,350.93 3.35,351.76 4.19,351.76 5.03,352.6 5.03,353.44 5.87,354.28 6.71,354.28 11.32,358.89 | 11.32,358.89 15.37,362.94 15.37,364.62 SV_DPLY_1.32 | SV_RAM_2.32 142.49,58.4 143.05,58.4 144.17,57.28 162.61,57.28 163.73,58.4 SV_CLK_1.31 164.01,58.67 176.86,58.67 v188.04,69.85 | 112.18,200.75 112.88,201.45 112.88,220.73 v95.56,238.05 | 112.18,200.75 112.04,200.61 108.69,200.61 107.57,201.73 106.73,201.73 SV_CU_2.31 | v60.35,297 54.76,302.59 54.76,307.34 55.88,308.46 SV_ALU_1.32 | v180.21,126.29 160.66,145.85 v130.48,145.85 | v119.02,193.34 v119.02,157.3 | v115.95,196.14 112.88,199.21 112.88,200.05 112.18,200.75 | 11.32,358.89 15.93,354.28 17.04,354.28 17.88,353.44 17.88,350.09 18.72,349.25 19.56,349.25 v54.48,314.32
!CTRL_ALU_ASSERT
  Bottom 0.406: SV_ALU_2.32 55.88,222.4 55.04,222.4 53.37,224.08 40.23,224.08 26.26,238.05 23.75,238.05 21.79,240 6.43,240 SV_EXT_3.23
!CTRL_DPLY_ENABLE  (via drill 0.35)
  Top 0.406: v14.53,255.37 v14.53,225.48
  Bottom 0.406: v14.53,225.48 14.53,225.75 11.73,228.55 11.18,228.55 10.06,229.67 6.43,229.67 SV_EXT_3.15 | v14.53,255.37 17.04,257.89 17.04,305.11 2.52,319.63 2.52,340.87 3.35,341.71 6.99,341.71 15.37,350.09 15.37,351.76 16.48,352.88 SV_DPLY_1.22
!CTRL_IR_LOAD
  Bottom 0.406: SV_EXT_3.13 6.43,227.43 11.18,227.43 12.29,226.31 12.29,220.45 21.79,210.95 39.67,210.95 44.42,215.7 51.13,215.7 54.76,219.33 54.76,220.45 55.32,221 58.95,221 59.79,221.84 59.79,222.68 60.63,223.52 64.26,223.52 65.1,222.68 78.79,222.68 95,238.89 96.95,238.89 116.79,219.05 116.79,202.01 SV_CU_2.23
!CTRL_RAM_ASSERT_MAIN  (via drill 0.35)
  Top 0.406: v188.32,58.67 186.92,57.28 160.66,57.28 159.54,58.4 145.01,58.4 SV_RAM_2.31 | v189.99,60.35 179.93,60.35 v164.01,76.28 | v151.99,88.29 151.99,89.69 136.63,105.05 73.2,105.05 v44.42,133.83 | v44.42,143.05 27.1,160.38 v27.1,161.77 | v13.13,175.74 v15.37,173.51 | v6.99,177.7 6.99,203.12 2.79,207.31 v2.79,210.39 | v3.07,223.52 1.68,224.92 1.68,234.42 3.63,236.37 4.75,236.37 5.87,237.49 SV_EXT_3.21
  Bottom 0.406: v189.99,60.35 v188.32,58.67 | v151.99,88.29 v164.01,76.28 | v44.42,143.05 v44.42,133.83 | v15.37,173.51 v27.1,161.77 | v13.13,175.74 8.94,175.74 v6.99,177.7 | v2.79,210.39 2.79,211.51 2.52,211.78 2.52,217.65 3.35,218.49 4.19,218.49 5.03,219.33 5.03,222.68 4.19,223.52 v3.07,223.52
!CTRL_RAM_LOAD_MAIN  (via drill 0.35)
  Top 0.406: v98.07,74.88 91.08,74.88 90.25,75.72 90.25,76.56 39.12,127.69 v39.12,133.83 | v13.13,163.73 v31.01,145.85 | v6.99,165.12 5.59,165.12 5.31,165.41 4.47,165.41 4.19,165.12 3.35,165.12 1.4,167.08 1.4,220.17 v2.23,221 | v2.52,230.23 3.35,231.06 4.19,231.06 5.31,232.18 6.15,232.18 SV_EXT_3.17
  Bottom 0.406: v98.07,74.88 101.98,74.88 114.55,62.31 142.49,62.31 143.61,61.19 144.73,61.19 SV_RAM_2.33 | v39.12,133.83 39.12,137.74 v31.01,145.85 | v13.13,163.73 8.38,163.73 v6.99,165.12 | v2.23,221 1.68,221.56 1.68,229.39 v2.52,230.23
!RESET  (via drill 0.35)
  Top 0.406: SV_RAM_2.28 142.49,53.09 143.33,53.09 144.45,51.97 162.61,51.97 163.73,53.09 SV_CLK_1.27 | v26.82,240 27.38,240.56 27.38,251.74 v36.04,260.4 v46.66,271.02 | v91.64,222.12 74.32,222.12 v72.92,223.52 | v49.45,330.25 49.45,309.86 50.57,308.74 SV_ALU_1.28 | v188.87,68.45 188.87,116.51 v181.05,124.33 | v118.19,143.89 116.79,145.29 116.79,158.42 124.61,166.24 126.29,166.24 v127.13,167.08 | v127.13,196.42 125.73,196.42 124.89,197.26 120.14,197.26 119.58,196.7 119.02,196.7 118.19,197.54 118.19,199.77 117.35,200.61 116.23,200.61 115.67,200.05 115.67,198.93 114.83,198.09 114,198.09 112.88,199.21 112.88,200.61 111.76,201.73 SV_CU_2.27
  Bottom 0.406: v26.82,240 25.7,241.12 8.66,241.12 7.26,242.52 6.43,242.52 SV_EXT_3.25 | v46.66,271.02 46.66,302.87 49.45,305.66 49.45,307.34 50.57,308.46 SV_ALU_1.28 | v91.64,222.12 111.76,202.01 SV_CU_2.27 | v36.04,260.4 v72.92,223.52 | v49.45,330.25 20.4,359.31 18.72,359.31 17.6,360.43 16.76,360.43 SV_DPLY_1.28 | v188.87,68.45 173.79,53.37 164.01,53.37 SV_CLK_1.27 | v181.05,124.33 161.49,143.89 v118.19,143.89 | v127.13,196.42 v127.13,167.08
ADDRESS_BUS_0  (via drill 0.35)
  Top 0.406: JP1.2 R32.2 | v6.99,62.03 2.52,57.56 2.52,56.72 3.63,55.6 3.63,54.76 SV_EXT_1.34 | v13.69,61.47 16.2,61.47 16.48,61.19 SV_RAM_1.34 | v189.71,93.88 v225.75,93.88 | v151.44,99.19 v157.58,93.04
  Bottom 0.406: v6.99,62.03 13.13,62.03 v13.69,61.47 | JP1.2 229.67,97.79 v225.75,93.88 | v189.71,93.88 158.42,93.88 v157.58,93.04 | v151.44,99.19 78.23,99.19 77.95,98.91 77.39,98.91 76.28,100.03 55.04,100.03 50.85,95.83 50.85,92.2 33.81,75.16 29.06,75.16 17.88,63.98 17.88,62.31 16.76,61.19 SV_RAM_1.34
ADDRESS_BUS_1  (via drill 0.35)
  Top 0.406: JP1.3 233.58,100.31 229.67,100.31 R31.2 229.39,100.58 228.27,101.7 v223.52,101.7 | v6.99,53.37 5.87,53.37 4.75,52.25 3.91,52.25 SV_EXT_1.32 | v220.17,101.7 219.33,102.54 v214.58,102.54 | v77.67,99.75 76.56,99.75 v76,99.19 | v20.4,63.14 19.56,62.31 18.72,62.31 17.88,61.47 17.88,59.79 SV_RAM_1.32
  Bottom 0.406: v6.99,53.37 11.46,53.37 SV_RAM_1.32 | v220.17,101.7 v223.52,101.7 | v214.58,102.54 214.58,109.25 202.01,121.82 180.49,121.82 158.7,100.03 137.19,100.03 136.91,99.75 v77.67,99.75 | v76,99.19 56.72,99.19 53.37,95.83 53.37,92.2 24.87,63.7 20.95,63.7 v20.4,63.14
ADDRESS_BUS_2  (via drill 0.35)
  Top 0.406: R30.2 229.67,102.82 233.58,102.82 JP1.4 | v6.99,48.34 5.87,48.34 4.75,49.45 3.91,49.45 SV_EXT_1.30 | v220.45,89.69 212.34,89.69 v203.96,81.31 | v178.54,55.88 165.68,55.88 164.57,54.76 147.52,54.76 145.29,57 136.91,57 136.07,56.16 136.07,51.69 v134.67,50.29 | v22.63,47.78 20.4,45.54 20.4,45.26 19.56,44.42 18.72,44.42 17.88,45.26 17.88,54.76 16.76,55.88 SV_RAM_1.30
  Bottom 0.406: v6.99,48.34 8.94,48.34 16.48,55.88 SV_RAM_1.30 | v220.45,89.69 233.58,102.82 JP1.4 | v178.54,55.88 v203.96,81.31 | v134.67,50.29 133.27,50.29 131.6,48.62 23.47,48.62 v22.63,47.78
ADDRESS_BUS_3  (via drill 0.35)
  Top 0.406: R29.2 229.67,105.33 233.58,105.33 JP1.5 | v3.07,15.37 1.96,16.48 1.96,45.54 2.79,46.38 3.07,46.38 3.63,46.94 SV_EXT_1.28 | v26.26,22.35 v26.26,25.7 84.38,25.7 105.61,46.94 164.29,46.94 172.39,55.04 186.64,55.04 210.67,79.07 v219.61,79.07 | v32.41,38.56 32.41,41.91 v48.34,57.84 | v33.81,69.29 v33.81,66.22 | v21.51,62.87 21.51,61.75 19.56,59.79 18.72,59.79 17.88,58.95 17.88,58.12 16.76,57 15.93,57 15.37,56.44 15.37,54.48 SV_RAM_1.28
  Bottom 0.406: v3.07,15.37 4.19,15.37 5.03,14.53 5.03,13.69 5.87,12.85 16.76,12.85 v26.26,22.35 | v26.26,25.7 26.26,28.78 32.41,34.92 v32.41,38.56 | v48.34,57.84 42.19,57.84 v33.81,66.22 | v33.81,69.29 31.29,69.29 24.87,62.87 v21.51,62.87 | v219.61,79.07 219.61,91.36 233.58,105.33 JP1.5
ADDRESS_BUS_4  (via drill 0.35)
  Top 0.406: R28.2 229.67,107.85 233.58,107.85 JP1.6 | v3.07,60.07 1.4,58.4 1.4,50.29 3.35,48.34 4.19,48.34 5.03,47.5 5.03,46.38 3.91,45.26 3.91,44.7 SV_EXT_1.26 | v10.9,58.67 10.9,56.44 16.48,50.85 SV_RAM_1.26 | v213.46,96.11 v219.05,101.7 | v165.12,50.29 164.29,49.45 123.77,49.45 v122.1,51.13
  Bottom 0.406: v3.07,60.07 9.5,60.07 v10.9,58.67 | v219.05,101.7 225.2,107.85 233.58,107.85 JP1.6 | v213.46,96.11 213.46,80.19 183.57,50.29 v165.12,50.29 | v122.1,51.13 28.78,51.13 26.82,53.09 20.95,53.09 19.56,54.48 18.44,54.48 17.88,53.92 17.88,52.25 16.48,50.85 SV_RAM_1.26
ADDRESS_BUS_5  (via drill 0.35)
  Top 0.406: R27.2 229.67,110.64 233.58,110.64 JP1.7 | v14.25,45.82 16.48,48.06 SV_RAM_1.24 | v207.03,96.11 v219.05,108.13
  Bottom 0.406: v14.25,45.82 5.87,45.82 5.03,44.98 5.03,43.87 3.91,42.75 3.91,41.91 SV_EXT_1.24 | v219.05,108.13 221.28,110.36 233.58,110.36 JP1.7 | v207.03,96.11 207.03,89.97 176.86,59.79 141.94,59.79 132.44,50.29 28.78,50.29 27.1,51.97 18.44,51.97 17.88,51.41 17.88,49.73 16.48,48.34 SV_RAM_1.24
ADDRESS_BUS_6  (via drill 0.35)
  Top 0.406: R26.2 229.67,113.16 233.58,113.16 JP1.8 | v5.59,32.97 5.03,33.53 5.03,37.44 3.91,38.56 3.91,39.12 SV_EXT_1.22 | 10.9,36.04 10.9,39.95 16.48,45.54 SV_RAM_1.22 | 10.9,36.04 v10.9,33.53 | v221.28,113.16 216.53,117.91 v202.84,117.91 | v58.4,95.83 58.4,89.69 37.72,69.01 37.72,53.65 v25.15,41.07 | v22.35,39.67 19.56,36.88 14.81,36.88 13.97,36.04 10.9,36.04
  Bottom 0.406: v5.59,32.97 10.34,32.97 v10.9,33.53 | v221.28,113.16 233.58,113.16 JP1.8 | v202.84,117.91 201.73,116.79 195.02,116.79 174.62,96.39 146.96,96.39 146.41,96.95 59.51,96.95 v58.4,95.83 | v25.15,41.07 25.15,40.79 24.03,39.67 v22.35,39.67
ADDRESS_BUS_7  (via drill 0.35)
  Top 0.406: R25.2 229.67,115.67 233.58,115.67 JP1.9 | v219.05,112.04 206.2,99.19 v190.55,99.19 | v182.45,99.19 159.54,76.28 131.88,76.28 97.51,41.91 v53.09,41.91
  Bottom 0.406: SV_EXT_1.20 3.91,36.88 3.91,37.72 5.03,38.84 5.03,42.19 5.87,43.03 16.48,43.03 SV_RAM_1.20 16.76,43.31 17.88,44.42 49.45,44.42 51.97,41.91 v53.09,41.91 | v219.05,112.04 222.4,115.39 233.58,115.39 JP1.9 | v182.45,99.19 v190.55,99.19
ADDRESS_BUS_8  (via drill 0.35)
  Top 0.406: R24.2 229.67,118.19 233.58,118.19 JP1.10 233.86,117.91 235.81,115.95 235.81,95 221.28,80.47 v202.01,80.47 | v13.69,38 16.48,40.79 SV_RAM_1.18 16.76,40.79 17.88,41.91 19.56,41.91 v23.75,46.1 | v135.23,51.97 109.53,51.97 v103.66,46.1
  Bottom 0.406: v13.69,38 5.87,38 5.03,37.16 5.03,36.32 3.91,35.2 3.91,34.37 SV_EXT_1.18 | v202.01,80.47 173.51,51.97 v135.23,51.97 | v23.75,46.1 v103.66,46.1
ADDRESS_BUS_9  (via drill 0.35)
  Top 0.406: R23.2 229.67,120.7 233.58,120.7 JP1.11 | v40.23,19.28 38.56,17.6 v10.9,17.6 | v5.59,17.88 5.03,18.44 5.03,19.56 4.19,20.4 3.35,20.4 2.52,21.23 2.52,30.45 SV_EXT_1.16
  Bottom 0.406: SV_EXT_1.16 3.91,31.85 3.91,32.69 5.03,33.81 5.03,34.65 5.87,35.48 13.97,35.48 16.48,38 SV_RAM_1.16 | v40.23,19.28 44.98,24.03 169.88,24.03 218.77,72.92 218.77,93.04 232.46,106.73 234.97,106.73 235.81,107.57 235.81,118.47 233.86,120.42 JP1.11 | v10.9,17.6 6.99,17.6 6.71,17.88 v5.59,17.88
ADDRESS_BUS_10  (via drill 0.35)
  Top 0.406: JP1.12 233.58,123.22 229.67,123.22 R22.2 229.39,123.22 228.83,123.77 228.83,124.05 228.27,124.61 224.08,124.61 223.52,125.17 223.52,126.29 223.24,126.57 203.96,126.57 202.01,124.61 v190.55,124.61 | v6.99,22.91 5.87,22.91 5.03,23.75 5.03,27.1 3.91,28.22 3.91,29.06 SV_EXT_1.14 | v11.18,24.03 11.18,30.18 16.48,35.48 SV_RAM_1.14 | v138.58,101.42 89.41,101.42 v77.95,89.97 | v21.51,34.37 v44.15,57
  Bottom 0.406: v6.99,22.91 10.06,22.91 v11.18,24.03 | v190.55,124.61 182.45,124.61 159.26,101.42 v138.58,101.42 | v77.95,89.97 64.82,76.83 64.82,73.2 48.62,57 v44.15,57 | v21.51,34.37 17.88,34.37 16.76,35.48 SV_RAM_1.14
ADDRESS_BUS_11  (via drill 0.35)
  Top 0.406: JP1.13 R21.2 229.39,125.73 228.83,126.29 228.83,126.57 228.27,127.13 177.7,127.13 v171.27,120.7 | v13.69,30.45 16.48,33.25 SV_RAM_1.12 16.76,33.25 17.88,34.37 19.56,34.37 v40.51,55.32 | v136.63,100.58 132.99,96.95 95.28,96.95 v83.26,84.94
  Bottom 0.406: v13.69,30.45 5.87,30.45 5.03,29.62 5.03,28.78 3.91,27.66 3.91,26.82 SV_EXT_1.12 | v171.27,120.7 156.74,120.7 v136.63,100.58 | v83.26,84.94 74.88,76.56 74.88,75.72 74.04,74.88 73.2,74.88 72.36,74.04 72.36,73.2 54.48,55.32 v40.51,55.32
ADDRESS_BUS_12  (via drill 0.35)
  Top 0.406: R20.2 229.67,128.25 233.58,128.25 JP1.14 | v202.29,134.39 202.01,134.39 201.73,134.67 183.29,134.67 166.52,117.91 166.52,90.81 163.73,88.01 156.19,88.01 v145.29,77.11 | v107.85,77.11 101.7,70.97 69.01,70.97 29.9,31.85 17.88,31.85 SV_RAM_1.10
  Bottom 0.406: SV_RAM_1.10 13.97,27.94 5.87,27.94 5.03,27.1 5.03,26.26 3.91,25.15 3.91,24.31 SV_EXT_1.10 | v202.29,134.39 208.15,128.52 233.58,128.52 JP1.14 | v107.85,77.11 v145.29,77.11
ADDRESS_BUS_13  (via drill 0.35)
  Top 0.406: R19.2 229.67,130.76 233.58,130.76 JP1.15 | v5.59,20.4 4.47,21.51 3.91,21.51 SV_EXT_1.8 | v15.37,23.75 15.37,26.82 16.48,27.94 SV_RAM_1.8 | v38.28,18.44 16.48,18.44 v15.37,19.56
  Bottom 0.406: v5.59,20.4 12.01,20.4 13.27,21.65 | v15.37,23.75 13.27,21.65 | v38.28,18.44 40.51,18.44 43.59,21.51 168.2,21.51 221.56,74.88 221.56,85.5 232.46,96.39 234.7,96.39 236.37,98.07 236.37,128.25 233.86,130.76 JP1.15 | 13.27,21.65 v15.37,19.56
ADDRESS_BUS_14
  Top 0.406: R18.2 229.67,133.27 233.58,133.27 JP1.16 233.86,133.27 236.37,130.76 236.37,94.72 221.56,79.91 210.67,79.91 190.27,59.51 164.57,59.51 164.29,59.79 138.02,59.79 130.76,52.53 108.97,52.53 82.98,26.54 17.88,26.54 16.76,25.43 SV_RAM_1.6
  Bottom 0.406: SV_EXT_1.6 3.91,19.28 3.91,19.84 5.03,20.95 5.03,24.59 5.87,25.43 16.48,25.43 SV_RAM_1.6
ADDRESS_BUS_15  (via drill 0.35)
  Top 0.406: R17.2 229.67,135.79 233.58,135.79 JP1.17 236.09,138.3 236.09,139.98 236.65,140.54 237.21,140.54 237.77,139.98 237.77,94.16 165.12,21.51 119.58,21.51 118.75,20.68 23.47,20.68 v22.63,19.84 21.23,19.84 19.56,21.51 18.72,21.51 17.6,22.63 16.76,22.63 SV_RAM_1.4
  Bottom 0.406: v22.63,19.84 18.16,15.37 5.87,15.37 4.75,16.48 3.91,16.48 SV_EXT_1.4
ALU_LEFT_BUS_0  (via drill 0.35)
  Top 0.406: v22.63,162.05 33.25,172.67 67.61,172.67 68.73,173.79 69.57,173.79 v69.85,173.51 | v58.4,207.59 v68.73,197.26 | v60.91,210.11 60.91,217.93 65.38,222.4 v65.38,223.52 | v24.87,252.02 24.87,293.09 20.4,297.56 20.4,305.94 SV_ALU_1.3
  Bottom 0.406: v22.63,162.05 8.38,162.05 7.82,162.61 5.87,162.61 4.75,163.73 3.91,163.73 SV_EXT_2.34 | v69.85,173.51 69.85,196.14 v68.73,197.26 | v60.91,210.11 v58.4,207.59 | v65.38,223.52 55.88,233.02 44.15,233.02 25.15,252.02 v24.87,252.02
ALU_LEFT_BUS_1  (via drill 0.35)
  Top 0.406: v19.84,160.38 32.97,173.51 v59.79,173.51 | v67.89,191.39 81.31,191.39 v85.78,195.86 | v85.78,199.49 84.66,200.61 84.66,209.27 96.95,221.56 96.95,222.12 95.56,223.52 v77.95,223.52 | v45.82,260.4 45.82,268.22 48.06,270.46 48.06,281.63 v27.38,302.31
  Bottom 0.406: v19.84,160.38 17.04,157.58 5.87,157.58 5.03,158.42 5.03,159.26 3.91,160.38 3.91,161.21 SV_EXT_2.32 | v59.79,173.51 59.79,183.29 v67.89,191.39 | v85.78,199.49 v85.78,195.86 | v77.95,223.52 45.82,255.65 v45.82,260.4 | v27.38,302.31 26.54,302.31 22.91,305.94 SV_ALU_1.5
ALU_LEFT_BUS_2  (via drill 0.35)
  Top 0.406: v3.07,147.24 1.96,148.36 1.96,157.02 3.63,158.7 SV_EXT_2.30 | v46.1,147.52 47.78,147.52 v52.53,152.27 | v73.76,173.51 v70.69,170.43 | v88.85,184.4 88.85,190.27 v92.2,193.62 | v89.97,232.74 89.97,240.28 v58.67,271.58 | v47.5,283.59 28.5,302.59 28.5,302.87 v27.38,303.99
  Bottom 0.406: v3.07,147.24 31.01,147.24 31.29,147.52 v46.1,147.52 | v70.69,170.43 v52.53,152.27 | v73.76,173.51 77.95,173.51 v88.85,184.4 | v92.2,193.62 97.51,193.62 102.82,198.93 102.82,207.87 89.97,220.73 v89.97,232.74 | v58.67,271.58 58.67,272.42 v47.5,283.59 | v27.38,303.99 25.43,305.94 SV_ALU_1.7
ALU_LEFT_BUS_3  (via drill 0.35)
  Top 0.406: v5.59,150.04 5.03,150.6 5.03,154.23 3.91,155.35 3.91,156.19 SV_EXT_2.28 | v10.9,151.71 10.9,159.54 10.62,159.82 10.62,185.52 v10.9,185.8 | v15.37,207.31 15.37,215.14 19,218.77 19,220.17 18.16,221 17.32,221 15.37,222.96 15.37,228.55 22.07,235.25 22.07,235.81 20.68,237.21 20.68,239.17 25.7,244.2 v25.7,291.97
  Bottom 0.406: v5.59,150.04 5.87,149.76 8.94,149.76 v10.9,151.71 | v10.9,185.8 10.9,199.21 5.59,204.52 5.59,208.15 6.15,208.71 12.01,208.71 13.41,207.31 v15.37,207.31 | v25.7,291.97 25.7,299.52 28.5,302.31 28.5,305.38 27.94,305.94 SV_ALU_1.9
ALU_LEFT_BUS_4  (via drill 0.35)
  Top 0.406: v39.95,144.73 v29.34,155.35
  Bottom 0.406: SV_EXT_2.26 4.75,153.67 6.15,155.07 20.68,155.07 20.95,155.35 v29.34,155.35 | v39.95,144.73 49.17,144.73 49.45,144.45 65.66,144.45 67.33,146.13 115.11,146.13 138.3,169.32 138.3,217.37 61.75,293.93 61.75,297.56 57,302.31 57,309.3 55.88,310.41 35.76,310.41 34.37,309.02 34.37,308.18 33.53,307.34 31.85,307.34 30.73,306.22 SV_ALU_1.11
ALU_LEFT_BUS_5  (via drill 0.35)
  Top 0.406: v35.76,153.11 36.6,153.95 v83.26,153.95 | v99.75,170.43 102.54,170.43 v104.22,172.11 | v104.22,190.55 104.22,192.79 110.36,198.93 110.36,200.05 109.8,200.61 101.14,200.61 100.31,201.45 100.31,205.08 v118.75,223.52 | v47.5,291.41 32.97,305.94 SV_ALU_1.13
  Bottom 0.406: v35.76,153.11 10.34,153.11 9.78,152.55 6.15,152.55 4.75,151.16 3.91,151.16 SV_EXT_2.24 | v99.75,170.43 v83.26,153.95 | v104.22,190.55 v104.22,172.11 | v118.75,223.52 50.85,291.41 v47.5,291.41
ALU_LEFT_BUS_6  (via drill 0.35)
  Top 0.406: v6.99,160.1 5.87,160.1 5.03,159.26 5.03,158.14 4.47,157.58 3.35,157.58 2.52,156.74 2.52,150.6 3.63,149.48 3.63,148.64 SV_EXT_2.22 | v11.46,160.1 11.46,161.21 11.18,161.49 11.18,178.54 v11.73,179.09 | v18.44,194.18 20.68,196.42 v23.19,196.42 | v24.87,198.09 25.43,198.65 25.43,199.77 26.26,200.61 27.1,200.61 27.94,201.45 27.94,217.93 29.06,219.05 29.06,222.96 27.38,224.64 27.38,226.03 47.78,246.43 47.78,260.4 49.17,261.8 49.17,292.53 35.76,305.94 SV_ALU_1.15
  Bottom 0.406: v11.46,160.1 v6.99,160.1 | v11.73,179.09 18.72,186.08 18.72,193.9 v18.44,194.18 | v24.87,198.09 v23.19,196.42
ALU_LEFT_BUS_7  (via drill 0.35)
  Top 0.406: v5.03,129.08 5.03,133.83 4.19,134.67 3.35,134.67 2.52,135.51 2.52,143.89 3.63,145.01 3.63,145.85 SV_EXT_2.20 | v13.13,122.66 19.84,122.66 38.56,141.38 46.94,141.38 49.73,144.17 49.73,148.64 51.97,150.88 v85.22,150.88 | v119.3,197.54 120.7,198.93 120.7,199.77 121.54,200.61 122.38,200.61 123.22,201.45 123.22,202.29 v127.69,206.76 | v54.2,299.8 44.42,299.8 38.28,305.94 SV_ALU_1.17
  Bottom 0.406: v5.03,129.08 5.03,127.97 6.15,126.85 8.94,126.85 v13.13,122.66 | v85.22,150.88 99.47,150.88 118.19,169.6 118.19,196.42 v119.3,197.54 | v127.69,206.76 127.69,226.31 v54.2,299.8
ALU_RIGHT_BUS_0  (via drill 0.35)
  Top 0.406: v104.78,233.3 98.91,233.3 v63.42,268.78
  Bottom 0.406: v104.78,233.3 120.7,217.37 120.7,157.02 113.16,149.48 67.33,149.48 64.54,146.69 50.57,146.69 39.95,157.3 30.45,157.3 24.87,162.89 8.38,162.89 7.54,163.73 6.43,163.73 SV_EXT_2.33 | v63.42,268.78 46.1,268.78 40.79,274.09 40.79,305.94 SV_ALU_1.19
ALU_RIGHT_BUS_1  (via drill 0.35)
  Top 0.406: v24.31,161.21 26.82,163.73 v73.48,163.73 | v78.51,168.76 102.82,168.76 105.33,171.27 121.82,171.27 v122.66,172.11
  Bottom 0.406: v24.31,161.21 6.43,161.21 SV_EXT_2.31 | v78.51,168.76 v73.48,163.73 | v122.66,172.11 122.66,198.37 123.22,198.93 123.22,217.09 70.69,269.62 46.1,269.62 43.31,272.42 43.31,305.94 SV_ALU_1.21
ALU_RIGHT_BUS_2  (via drill 0.35)
  Top 0.406: v21.23,154.51 v17.04,158.7
  Bottom 0.406: v17.04,158.7 6.43,158.7 SV_EXT_2.29 | v21.23,154.51 38,154.51 42.75,149.76 46.66,149.76 50.29,146.13 64.82,146.13 67.61,148.92 113.44,148.92 125.73,161.21 125.73,215.42 70.97,270.18 46.38,270.18 45.82,270.74 45.82,305.94 SV_ALU_1.23
ALU_RIGHT_BUS_3  (via drill 0.35)
  Top 0.406: v80.75,156.46 v39.67,156.46 | v93.88,169.6 102.82,169.6 v105.33,172.11 | v92.48,220.17 92.48,222.4 91.92,222.96 78.51,222.96 78.23,222.68 77.67,222.68 v76.83,223.52 | v51.13,249.22 51.13,293.93 55.88,298.68 55.88,299.24 49.17,305.94 48.34,305.94 SV_ALU_1.25
  Bottom 0.406: v39.67,156.46 6.43,156.46 SV_EXT_2.27 | v93.88,169.6 v80.75,156.46 | v105.33,172.11 105.33,186.08 112.04,192.79 112.04,194.74 107.85,198.93 107.85,200.05 107.29,200.61 106.17,200.61 105.33,201.45 105.33,207.31 v92.48,220.17 | v51.13,249.22 v76.83,223.52
ALU_RIGHT_BUS_4  (via drill 0.35)
  Top 0.406: v36.88,153.11 84.1,153.11 v89.13,148.08
  Bottom 0.406: SV_EXT_2.25 34.09,153.67 34.37,153.95 36.04,153.95 v36.88,153.11 | v89.13,148.08 113.44,148.08 128.25,162.89 128.25,204.24 126.29,206.2 126.29,217.37 50.85,292.81 50.85,305.94 SV_ALU_1.27
ALU_RIGHT_BUS_5
  Bottom 0.406: SV_EXT_2.23 6.43,151.16 9.22,151.16 10.62,152.55 34.09,152.55 37.44,149.2 46.38,149.2 50.01,145.57 65.1,145.57 66.78,147.24 113.44,147.24 128.8,162.61 128.8,196.98 130.76,198.93 130.76,202.56 126.85,206.48 126.85,217.65 88.85,255.65 88.85,264.03 53.37,299.52 53.37,305.94 SV_ALU_1.29
ALU_RIGHT_BUS_6
  Bottom 0.406: SV_ALU_1.31 55.88,302.59 61.19,297.28 61.19,293.65 128.25,226.59 128.25,208.99 133.27,203.96 133.27,198.93 132.44,198.09 132.44,164.29 114.83,146.69 67.06,146.69 65.38,145.01 49.73,145.01 46.1,148.64 6.43,148.64 SV_EXT_2.21
ALU_RIGHT_BUS_7  (via drill 0.35)
  Top 0.406: v5.03,142.77 5.03,143.89 6.15,145.01 6.15,145.85 SV_EXT_2.19 | v35.76,135.23 43.03,135.23 43.31,135.51 44.98,135.51 49.45,139.98 95.83,139.98 100.03,135.79 124.61,135.79 v148.92,160.1 | v168.48,184.96 v162.33,178.82
  Bottom 0.406: v5.03,142.77 5.59,142.22 28.78,142.22 v35.76,135.23 | v148.92,160.1 148.92,160.66 141.1,168.48 141.1,169.04 150.88,178.82 v162.33,178.82 | v168.48,184.96 152.83,184.96 140.82,196.98 140.82,215.7 112.32,244.2 112.32,247.83 58.67,301.47 58.67,305.94 SV_ALU_1.33
CLK  (via drill 0.35)
  Top 0.406: v5.03,356.24 5.03,322.15 2.52,319.63 2.52,254.81 3.35,253.97 4.19,253.97 5.03,253.14 5.03,252.3 6.15,251.18 6.15,250.34 SV_EXT_3.31 | SV_RAM_2.34 142.49,61.19 143.33,61.19 144.45,62.31 162.61,62.31 163.73,61.19 SV_CLK_1.33 | v162.89,88.85 162.89,98.63 162.61,98.91 162.61,123.19 153.67,132.13 153.67,135.89 JP5.1 163.73,146.13 162.61,146.13 v159.82,148.92 | v90.81,233.58 90.81,240.28 59.51,271.58 v59.51,301.75 | v139.14,188.59 115.67,188.59 v111.2,193.06 | SV_DPLY_1.34 16.76,368.53 17.6,368.53 18.72,369.65 19.56,369.65 58.4,330.81 58.4,308.74 SV_ALU_1.34
  Bottom 0.406: v5.03,356.24 5.59,356.79 6.71,356.79 15.37,365.45 15.37,367.13 16.48,368.25 SV_DPLY_1.34 | v162.89,88.85 162.89,78.51 165.12,76.28 165.12,62.31 164.01,61.19 SV_CLK_1.33 | v90.81,233.58 90.81,220.73 103.94,207.59 103.94,202.01 SV_CU_2.33 104.22,201.73 105.33,200.61 105.33,198.93 v111.2,193.06 | v59.51,301.75 59.51,305.38 59.79,305.66 59.79,307.34 58.67,308.46 SV_ALU_1.34 | v159.82,148.92 158.98,148.92 142.49,165.41 142.49,166.24 138.86,169.88 138.86,188.32 v139.14,188.59
CTRL1_REG_A_1  (via drill 0.35)
  Top 0.406: v200.33,191.67 204.24,187.76 215.7,187.76 219.05,184.4 232.18,184.4 SV1.3 | v131.6,226.03 55.32,226.03 51.97,222.68 51.97,207.03 52.11,206.9 | 52.11,206.9 57,202.01 SV_CU_1.3 | v6.43,207.87 2.52,211.78 2.52,212.62 3.63,213.74 3.63,214.58 SV_EXT_3.4 | v15.65,205.64 17.32,205.64 21.79,210.11 22.35,210.11 v23.19,209.27 | v51.97,206.76 52.11,206.9
  Bottom 0.406: v200.33,191.67 182.45,191.67 148.08,226.03 v131.6,226.03 | v6.43,207.87 12.01,207.87 14.25,205.64 v15.65,205.64 | v23.19,209.27 24.87,209.27 26.26,207.87 43.87,207.87 44.98,206.76 v51.97,206.76
CTRL2_REG_A_2  (via drill 0.35)
  Top 0.406: v208.71,205.08 146.13,205.08 143.61,202.56 143.61,197.26 145.01,195.86 145.01,195.3 142.22,192.51 112.88,192.51 111.48,193.9 v108.69,193.9 | v98.91,193.9 93.04,193.9 90.25,196.7 69.29,196.7 69.01,196.42 67.06,196.42 60.07,203.4 v58.4,203.4 | v50.57,203.12 53.37,203.12 54.48,202.01 SV_CU_1.5
  Bottom 0.406: v208.71,205.08 232.18,181.61 SV1.5 | v98.91,193.9 v108.69,193.9 | v58.4,203.4 56.16,203.4 54.76,202.01 SV_CU_1.5 | v50.57,203.12 35.48,203.12 34.09,204.52 23.47,204.52 12.01,215.98 5.87,215.98 4.75,217.09 3.91,217.09 SV_EXT_3.6
CTRL3_REG_A_3  (via drill 0.35)
  Top 0.406: v26.54,205.92 26.54,208.71 26.82,208.99 26.82,209.55 v22.63,213.74 | v217.09,181.05 v219.33,181.05 | v144.17,195.58 117.63,195.58 116.23,196.98 110.64,196.98 v105.05,191.39 | v58.67,198.09 54.2,198.09 53.37,198.93 53.37,200.61 52.25,201.73 SV_CU_1.7
  Bottom 0.406: v26.54,205.92 33.53,205.92 35.76,203.68 44.98,203.68 45.26,203.96 50.85,203.96 51.97,202.84 51.97,202.01 SV_CU_1.7 | v22.63,213.74 19.84,213.74 12.85,220.73 12.85,226.59 11.46,227.99 7.54,227.99 6.99,228.55 5.87,228.55 5.03,227.71 5.03,226.87 4.19,226.03 3.35,226.03 2.23,224.92 2.23,222.12 3.63,220.73 3.63,219.89 SV_EXT_3.8 | v219.33,181.05 225.75,181.05 227.71,179.09 232.18,179.09 SV1.7 | v217.09,181.05 211.51,186.64 153.11,186.64 v144.17,195.58 | v105.05,191.39 88.29,191.39 85.78,193.9 84.38,193.9 77.95,200.33 62.31,200.33 60.07,198.09 v58.67,198.09
CTRL4_REG_A_4  (via drill 0.35)
  Top 0.406: v49.45,209.55 49.45,202.01 SV_CU_1.9 | v43.59,213.74 43.59,215.42 v42.75,216.26 | v20.95,226.87 16.48,226.87 v16.2,226.59 | v10.9,226.59 v10.9,230.78 | v6.99,226.03 5.87,226.03 5.03,225.2 5.03,223.52 3.91,222.4 SV_EXT_3.10 | v217.65,179.38 v219.33,179.38 | v144.17,185.52 142.77,185.52 140.54,187.76 113.72,187.76 v109.53,191.95 | v79.35,200.05 67.89,200.05 v58.4,209.55
  Bottom 0.406: v43.59,213.74 45.26,213.74 v49.45,209.55 v58.4,209.55 | v42.75,216.26 32.13,216.26 29.34,219.05 29.34,225.75 28.22,226.87 v20.95,226.87 | v16.2,226.59 15.37,226.59 11.18,230.78 v10.9,230.78 | v10.9,226.59 7.54,226.59 v6.99,226.03 | v219.33,179.38 226.59,179.38 229.39,176.58 232.18,176.58 SV1.9 | v217.65,179.38 213.46,183.57 146.13,183.57 v144.17,185.52 | v109.53,191.95 105.61,191.95 105.33,192.23 88.29,192.23 86.06,194.46 84.94,194.46 v79.35,200.05
CTRL5_REG_L_1  (via drill 0.35)
  Top 0.406: v22.91,180.21 10.9,192.23 v10.9,219.05 | v219.05,173.79 v228.83,173.79 | v161.21,167.92 106.45,167.92 v105.33,169.04 | v57.84,197.26 50.01,197.26 48.34,198.93 48.34,200.61 47.22,201.73 SV_CU_1.11
  Bottom 0.406: v22.91,180.21 25.43,180.21 35.2,189.99 49.45,189.99 53.92,194.46 53.92,195.86 50.85,198.93 50.85,199.77 50.01,200.61 49.17,200.61 48.06,201.73 47.22,201.73 SV_CU_1.11 | v10.9,219.05 7.54,222.4 7.54,222.68 6.71,223.52 5.03,223.52 3.91,224.64 SV_EXT_3.12 | v228.83,173.79 232.18,173.79 SV1.11 | v219.05,173.79 215.7,173.79 210.67,168.76 166.8,168.76 165.96,167.92 v161.21,167.92 | v105.33,169.04 76.28,198.09 64.54,198.09 60.63,194.18 59.79,194.18 57.84,196.14 v57.84,197.26
CTRL6_REG_L_2  (via drill 0.35)
  Top 0.406: v218.21,174.62 229.11,174.62 232.18,171.55 SV1.13 | v144.17,169.88 143.33,169.04 142.77,169.04 142.22,169.6 v106.17,169.6 | v60.35,195.02 59.79,194.46 v52.81,194.46 | v24.87,249.78 v16.2,258.44 | v31.57,231.62 v31.57,243.08 | v39.4,223.8 39.4,214.58 41.07,212.9 v41.07,211.23 | v48.62,208.99 44.98,205.36 44.42,205.36 43.87,204.8 43.87,202.56 44.42,202.01 SV_CU_1.13
  Bottom 0.406: v218.21,174.62 215.7,174.62 212.62,171.55 145.85,171.55 v144.17,169.88 | v106.17,169.6 104.5,171.27 103.94,171.27 76.56,198.65 63.98,198.65 v60.35,195.02 | v52.81,194.46 48.34,198.93 48.34,199.77 47.5,200.61 45.82,200.61 44.7,201.73 SV_CU_1.13 | v16.2,258.44 5.31,258.44 1.4,254.53 1.4,233.02 3.35,231.06 4.47,231.06 5.03,230.5 5.03,229.39 3.91,228.27 3.91,227.43 SV_EXT_3.14 | v31.57,243.08 v24.87,249.78 | v39.4,223.8 v31.57,231.62 | v41.07,211.23 46.38,211.23 v48.62,208.99
CTRL7_REG_L_3  (via drill 0.35)
  Top 0.406: v213.18,181.61 217.65,177.14 228.27,177.14 230.23,175.18 235.53,175.18 236.09,174.62 236.09,170.99 235.25,170.16 234.42,170.16 233.3,169.04 232.46,169.04 SV1.15 | v141.66,185.52 139.98,187.2 113.16,187.2 v107.57,192.79 | v81.31,199.21 67.89,199.21 58.67,208.43 v55.32,208.43 | SV_CU_1.15 41.91,204.52 v45.54,208.15 47.78,210.39 v47.78,217.09 | v5.59,231.34 5.31,231.34 3.91,229.95 SV_EXT_3.16 | v2.79,236.65 2.23,237.21 2.23,245.31 3.35,246.43 v4.47,246.43 | v10.9,248.39 v10.9,251.46 | v29.9,229.67 v29.9,238.05
  Bottom 0.406: v213.18,181.61 212.62,182.17 211.78,182.17 211.51,182.45 144.73,182.45 v141.66,185.52 | v107.57,192.79 88.57,192.79 86.33,195.02 85.5,195.02 v81.31,199.21 | v55.32,208.43 49.17,208.43 48.9,208.15 v45.54,208.15 | v5.59,231.34 5.03,231.9 5.03,233.02 4.47,233.58 3.35,233.58 2.52,234.42 2.52,236.37 v2.79,236.65 | v4.47,246.43 5.03,246.99 5.03,248.11 5.87,248.94 8.38,248.94 v10.9,251.46 | v10.9,248.39 15.09,248.39 21.79,241.68 26.26,241.68 v29.9,238.05 | v29.9,229.67 36.88,222.68 36.88,221.56 36.6,221.28 36.6,220.45 36.88,220.17 36.88,219.33 39.12,217.09 v47.78,217.09
CTRL8_REG_L_4  (via drill 0.35)
  Top 0.406: v212.62,179.93 212.62,177.98 213.18,177.42 213.46,177.42 228.27,162.61 233.02,162.61 233.58,163.17 233.58,164.29 232.46,165.41 232.46,166.24 SV1.17 | v96.39,184.96 v139.7,184.96 | v59.51,196.7 58.4,196.7 58.12,196.42 38.84,196.42 v38.56,196.14 38.56,196.42 32.41,196.42 31.57,195.58 25.43,195.58 23.75,197.26 19.56,197.26 17.88,198.93 17.88,199.77 17.04,200.61 16.2,200.61 14.53,202.29 14.53,215.14 16.76,217.37 v16.76,218.77 | v3.07,238.61 4.19,238.61 5.03,239.45 5.03,240.56 v5.59,241.12 | v24.03,238.89 24.03,228.83 19.28,224.08 v16.2,224.08
  Bottom 0.406: v212.62,179.93 211.78,180.77 211.51,180.77 210.95,181.33 143.33,181.33 v139.7,184.96 | v96.39,184.96 92.48,184.96 77.67,199.77 62.59,199.77 v59.51,196.7 | v38.56,196.14 38.56,198.37 38,198.93 38,200.61 39.12,201.73 SV_CU_1.17 | v3.07,238.61 1.96,237.49 1.96,234.14 3.63,232.46 SV_EXT_3.18 | v5.59,241.12 5.87,241.4 7.54,241.4 8.38,240.56 22.35,240.56 v24.03,238.89 | v16.2,224.08 16.2,223.8 15.93,223.52 15.93,219.61 v16.76,218.77
CTRL9_16REG_A_ADDR_1  (via drill 0.35)
  Top 0.406: v213.46,178.26 227.99,163.73 232.18,163.73 SV1.19 | v48.9,179.65 v139.7,179.65 | v35.48,193.06 v41.91,186.64 | v5.59,236.09 4.47,234.97 3.91,234.97 SV_EXT_3.20 | v22.07,242.52 v18.16,238.61 | v55.32,224.64 57.28,222.68 57.28,219.05 v58.12,218.21 | v58.12,215.14 58.12,212.34 54.48,208.71 54.48,206.2 58.4,202.29 58.4,201.45 59.23,200.61 60.07,200.61 62.03,198.65 v62.03,191.67
  Bottom 0.406: v213.46,178.26 212.62,179.09 212.34,179.09 210.67,180.77 140.82,180.77 v139.7,179.65 | v41.91,186.64 44.01,184.54 | 44.01,184.54 v48.9,179.65 | v35.48,193.06 35.48,200.61 36.6,201.73 SV_CU_1.19 | v5.59,236.09 15.65,236.09 v18.16,238.61 | v22.07,242.52 26.54,242.52 41.63,227.43 41.63,225.48 42.47,224.64 v55.32,224.64 | v58.12,215.14 v58.12,218.21 | v62.03,191.67 62.87,190.83 62.87,190.27 59.23,186.64 46.1,186.64 44.01,184.54
CTRL10_16REG_A_ADDR_2  (via drill 0.35)
  Top 0.406: v32.13,211.78 32.13,203.96 34.09,202.01 SV_CU_1.21 | v123.5,148.08 116.23,140.82 97.51,140.82 73.76,164.57 v62.59,164.57 | v41.91,185.24 37.72,185.24 v32.69,190.27
  Bottom 0.406: v32.13,211.78 28.78,215.14 19.28,215.14 15.37,219.05 15.37,225.75 12.01,229.11 11.46,229.11 6.99,233.58 5.87,233.58 5.03,234.42 5.03,235.53 3.91,236.65 3.91,237.49 SV_EXT_3.22 | v123.5,148.08 123.77,147.8 159.82,147.8 164.57,152.55 217.65,152.55 230.5,165.41 231.06,165.41 231.34,165.12 232.74,165.12 233.58,164.29 233.58,163.17 232.46,162.05 232.46,161.49 SV1.21 | v41.91,185.24 v62.59,164.57 | v32.69,190.27 32.69,198.65 32.97,198.93 32.97,200.61 SV_CU_1.21
CTRL11_16REG_A_ADDR_3  (via drill 0.35)
  Top 0.406: v30.73,208.71 31.57,207.87 31.57,202.01 SV_CU_1.23 | v25.98,209.27 21.79,213.46 21.79,219.05 21.51,219.33 v21.51,225.2 | v20.12,235.53 15.37,240.28 15.37,255.65 v14.53,256.49 | v10.9,253.14 v10.9,256.49 | v214.86,174.9 215.14,174.9 231.06,158.98 232.18,158.98 SV1.23 | v159.82,175.18 140.54,175.18 140.26,174.9 139.7,174.9 139.14,175.46 20.68,175.46 17.88,178.26 17.04,178.26 16.48,178.82 v16.48,179.65
  Bottom 0.406: v30.73,208.71 26.54,208.71 v25.98,209.27 | v21.51,225.2 20.12,226.59 v20.12,235.53 | v10.9,256.49 v14.53,256.49 | v10.9,253.14 8.38,253.14 6.71,251.46 5.87,251.46 5.03,250.62 5.03,249.78 4.19,248.94 3.35,248.94 1.96,247.55 1.96,241.96 3.63,240.28 SV_EXT_3.24 | v214.86,174.9 212.34,174.9 210.67,176.58 190.55,176.58 188.04,179.09 163.73,179.09 v159.82,175.18 | v16.48,179.65 20.4,183.57 20.4,184.12 23.19,186.92 29.62,186.92 30.45,187.76 30.45,200.61 31.57,201.73 SV_CU_1.23
CTRL12_CREG_INC_1  (via drill 0.35)
  Top 0.406: v214.02,175.74 214.02,174.62 214.58,174.07 215.14,174.07 232.18,157.02 232.18,156.46 SV1.25 | v139.7,172.95 75.44,172.95 74.04,174.35 20.12,174.35 17.32,177.14 16.2,177.14 14.81,178.54 14.81,179.38 v15.93,180.49 | v34.37,217.09 34.37,216.53 29.34,211.51 29.34,203.96 29.62,203.68 29.62,202.29 29.34,202.01 SV_CU_1.25
  Bottom 0.406: v214.02,175.74 210.11,179.65 146.41,179.65 v139.7,172.95 | v15.93,180.49 22.91,187.48 29.34,187.48 29.9,188.04 29.9,196.98 27.94,198.93 27.94,200.61 29.06,201.73 SV_CU_1.25 | v34.37,217.09 34.37,222.68 29.06,227.99 29.06,231.9 21.51,239.45 17.88,239.45 17.32,238.89 5.87,238.89 5.03,239.72 5.03,240.56 3.91,241.68 3.91,242.52 SV_EXT_3.26
CTRL13_CREG_INC_2  (via drill 0.35)
  Top 0.406: v29.06,188.32 32.97,188.32 38,183.29 47.22,183.29 v47.5,183.57 | v141.94,168.76 v116.23,168.76 | v219.05,157.02 228.83,157.02 232.18,153.67 SV1.27 | v76.28,261.8 76.28,258.44 v100.58,234.14
  Bottom 0.406: v29.06,188.32 29.34,188.59 29.34,195.02 25.43,198.93 25.43,199.77 26.54,200.89 26.54,201.73 SV_CU_1.27 | v47.5,183.57 59.79,171.27 100.86,171.27 103.94,168.2 115.67,168.2 v116.23,168.76 116.79,169.32 116.79,196.42 115.67,197.54 115.67,219.05 v100.58,234.14 | v141.94,168.76 143.33,168.76 148.36,163.73 212.34,163.73 v219.05,157.02 | v76.28,261.8 28.78,261.8 20.4,253.42 13.97,253.42 6.99,246.43 5.87,246.43 4.75,245.31 3.91,245.31 SV_EXT_3.28
CTRL14_CREG_DEC_1  (via drill 0.35)